# EAGLE board sencerMain2out (EAGLE 7.4.0)
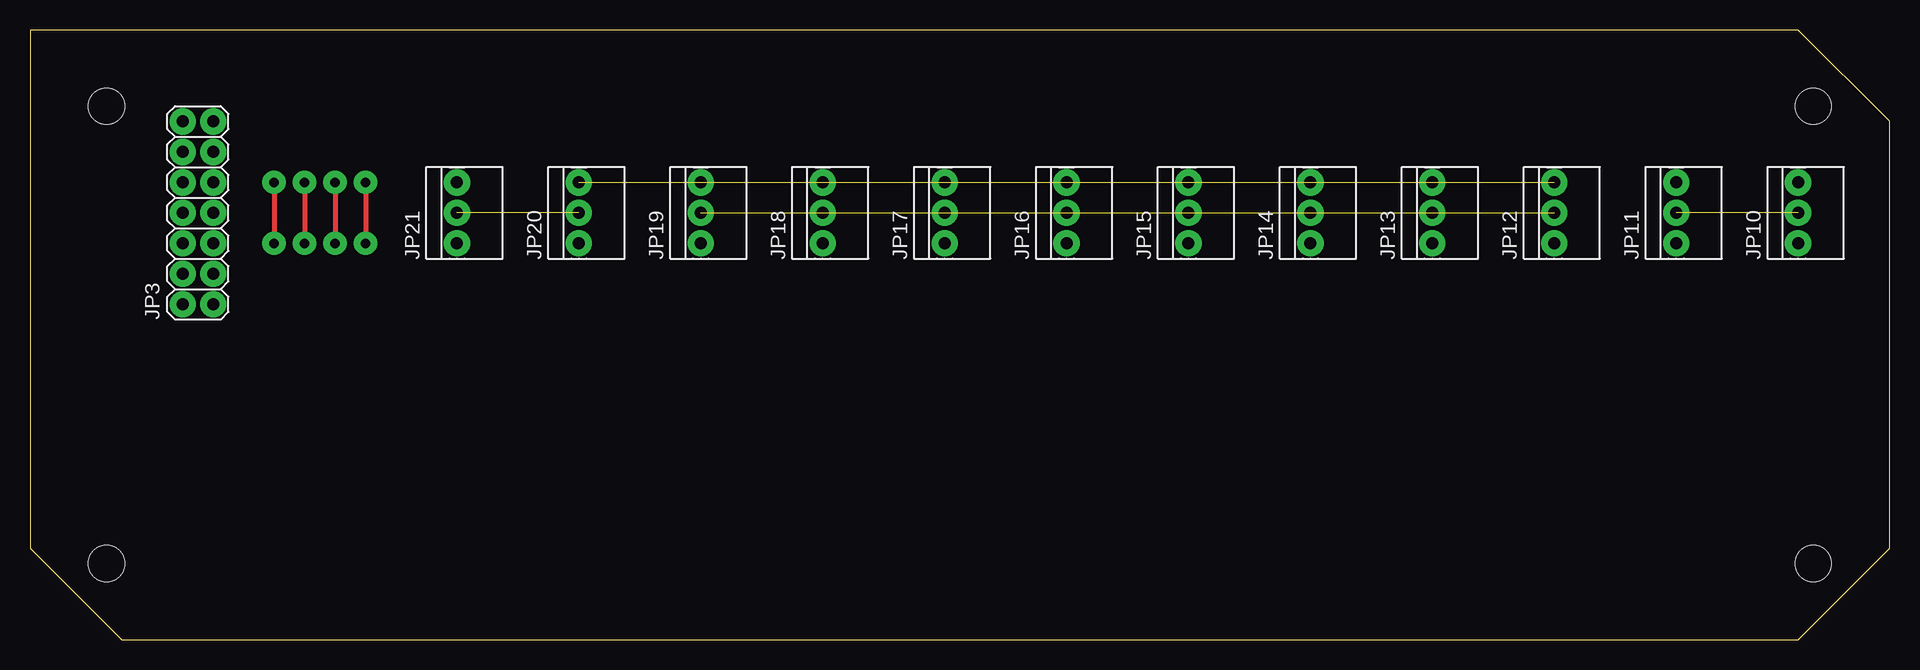
[diagram p0: board, top side]
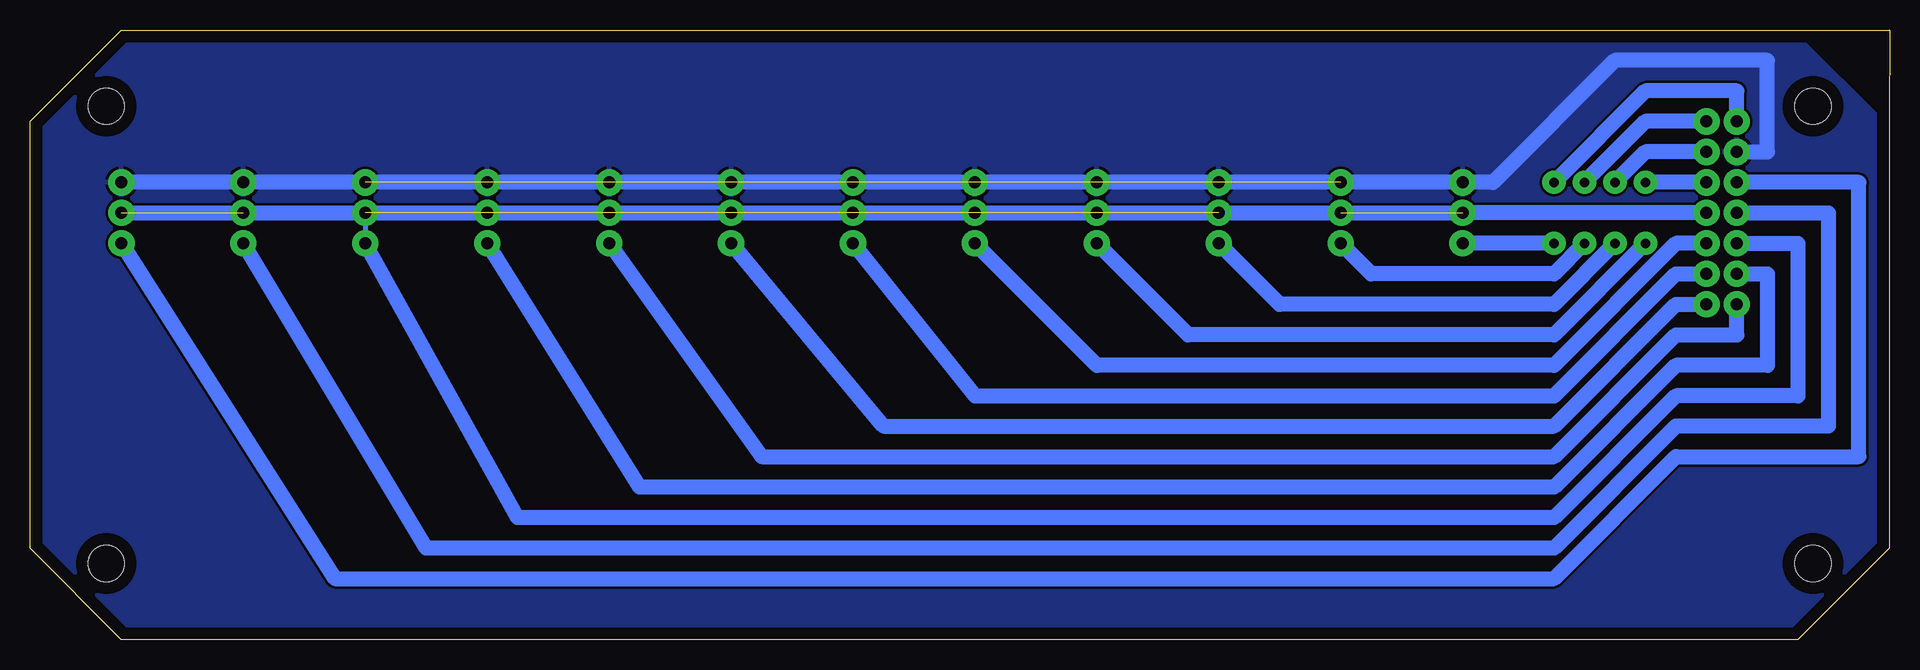
[diagram p1: board, bottom side, seen from below]

Size 154.96 x 50.81 mm. Coordinates in mm from the lower left corner, seen from the top.
Outline: 147.36,50.79 154.96,43.19 154.96,7.63 147.34,0.01 7.65,0.01 7.65,0 0.02,7.63 0.02,43.19 0,50.79
Outline: 147.34,50.81 147.36,50.79
Outline: 147.36,50.79 0,50.79
Outline: 0,50.79 0.02,50.81
Copper layers (1*16): Top 0.035mm / dielectric 1.5mm / Bottom 0.035mm
Design rules "default": minimum track width 10mil, minimum drill 24mil, track to track 8mil, track to pad 8mil, pad to pad 8mil, via to via 8mil, smd to smd 8mil, copper to edge 40mil, drill to drill 8mil, minimum pad ring 10mil, minimum via ring 8mil, stop-mask expansion 4mil, vias tented up to drill 0mil, thermal gap 10mil
Holes 3 mm at 148.61,6.36 148.61,44.46 6.37,44.46 6.37,6.36

## Footprints (pad centres in the part's own frame; a part is rotated, then mirrored left to right if it is on the bottom)
2X07 = drill 1 pad 2.184: 1 -7.62,-1.27; 2 -7.62,1.27; 3 -5.08,-1.27; 4 -5.08,1.27; 5 -2.54,-1.27; 6 -2.54,1.27; 7 0,-1.27; 8 0,1.27; 9 2.54,-1.27; 10 2.54,1.27; 11 5.08,-1.27; 12 5.08,1.27; 13 7.62,-1.27; 14 7.62,1.27
1*03 = drill 1 pad 2.184: 1 -2.54,0; 2 0,0; 3 2.54,0

## Placement (x,y rotation side)
JP3  [2X07]  13.99,35.57 90 top
JP10  [1*03]  147.34,35.57 90 top
JP11  [1*03]  137.18,35.57 90 top
JP12  [1*03]  127.02,35.57 90 top
JP13  [1*03]  116.86,35.57 90 top
JP14  [1*03]  106.7,35.57 90 top
JP15  [1*03]  96.54,35.57 90 top
JP16  [1*03]  86.38,35.57 90 top
JP17  [1*03]  76.22,35.57 90 top
JP18  [1*03]  66.06,35.57 90 top
JP19  [1*03]  55.9,35.57 90 top
JP20  [1*03]  45.74,35.57 90 top
JP21  [1*03]  35.58,35.57 90 top

## Library data of the parts
JP3 JP10-JP21 = pinhead_s

## Nets
+5V: JP3.7 JP10.2 JP11.2 JP12.2 JP13.2 JP14.2 JP15.2 JP16.2 JP17.2 JP18.2 JP19.2 JP20.2 JP21.2
FOT1: JP3.10 JP10.1
FOT2: JP3.8 JP11.1
FOT3: JP3.6 JP12.1
FOT4: JP3.4 JP13.1
GND: JP3.12 JP10.3 JP11.3 JP13.3 JP14.3 JP15.3 JP17.3 JP18.3 JP19.3 JP21.3
N$25: JP12.3 JP16.3 JP20.3
RIMIT1: JP3.2 JP14.1
RIMIT2: JP3.1 JP15.1
RIMIT3: JP3.3 JP16.1
RIMIT4: JP3.5 JP17.1
RIMIT5: JP3.9 JP18.1
RIMIT6: JP3.11 JP19.1
RIMIT7: JP3.13 JP20.1
RIMIT8: JP3.14 JP21.1

## Tracks (layer width: path | path; a pad name or v marks a point on that pad's centre or on a via)
+5V  (9 unrouted)
  Bottom 0.406: JP21.2 JP12.2
  Bottom 1.27: JP3.7 JP21.2 JP10.2
FOT1
  Bottom 1.27: JP10.1 129.56,5.09 27.96,5.09 17.8,15.25 2.56,15.25 2.56,38.11 JP3.10
FOT2
  Bottom 1.27: JP3.8 5.1,35.57 5.1,17.79 17.8,17.79 27.96,7.63 121.94,7.63 JP11.1
FOT3
  Bottom 0.406: 127.02,35.57 JP12.1
  Bottom 1.27: JP3.6 7.64,33.03 7.64,20.33 17.8,20.33 27.96,10.17 114.32,10.17 JP12.1
FOT4
  Bottom 1.27: JP3.4 10.18,30.49 10.18,22.87 17.8,22.87 27.96,12.71 104.16,12.71 JP13.1
GND
  Bottom 1.27: JP3.12 10.18,40.65 10.18,48.27 22.88,48.27 33.04,38.11 JP10.3
  pour Bottom: 0.65,7.63 7.64,0.65 146.71,0.65 154.32,8.27 154.32,42.56 146.71,50.18 7.64,50.18 0.65,43.19
N$25  (2 unrouted)
RIMIT1
  Bottom 1.27: JP14.1 94,15.25 27.96,15.25 17.8,25.41 12.72,25.41 JP3.2
RIMIT2
  Bottom 1.27: JP3.1 17.8,27.95 27.96,17.79 83.84,17.79 JP15.1
RIMIT3
  Bottom 1.27: JP16.1 76.22,20.33 27.96,20.33 17.8,30.49 JP3.3
RIMIT4
  Bottom 1.27: JP3.5 17.8,33.03 27.96,22.87 66.06,22.87 JP17.1
RIMIT5  (via drill 0.8 pad 1.93)
  Top 0.406: v20.34,38.11 v20.34,33.03
  Bottom 1.27: JP3.9 v20.34,38.11 | v20.34,33.03 27.96,25.41 58.44,25.41 JP18.1
RIMIT6  (via drill 0.8 pad 1.93)
  Top 0.406: v22.88,38.11 v22.88,33.03
  Bottom 1.27: JP3.11 20.34,40.65 v22.88,38.11 | v22.88,33.03 27.96,27.95 50.82,27.95 JP19.1
RIMIT7  (via drill 0.8 pad 1.93)
  Top 0.406: v25.42,38.11 v25.42,33.03
  Bottom 1.27: JP3.13 20.34,43.19 v25.42,38.11 | v25.42,33.03 27.96,30.49 43.2,30.49 JP20.1
RIMIT8  (via drill 0.8 pad 1.93)
  Top 0.406: v27.96,38.11 v27.96,33.03
  Bottom 1.27: JP3.14 12.72,45.73 20.34,45.73 v27.96,38.11 | v27.96,33.03 JP21.1